# EAGLE board PCB v55 (EAGLE 9.7.0)
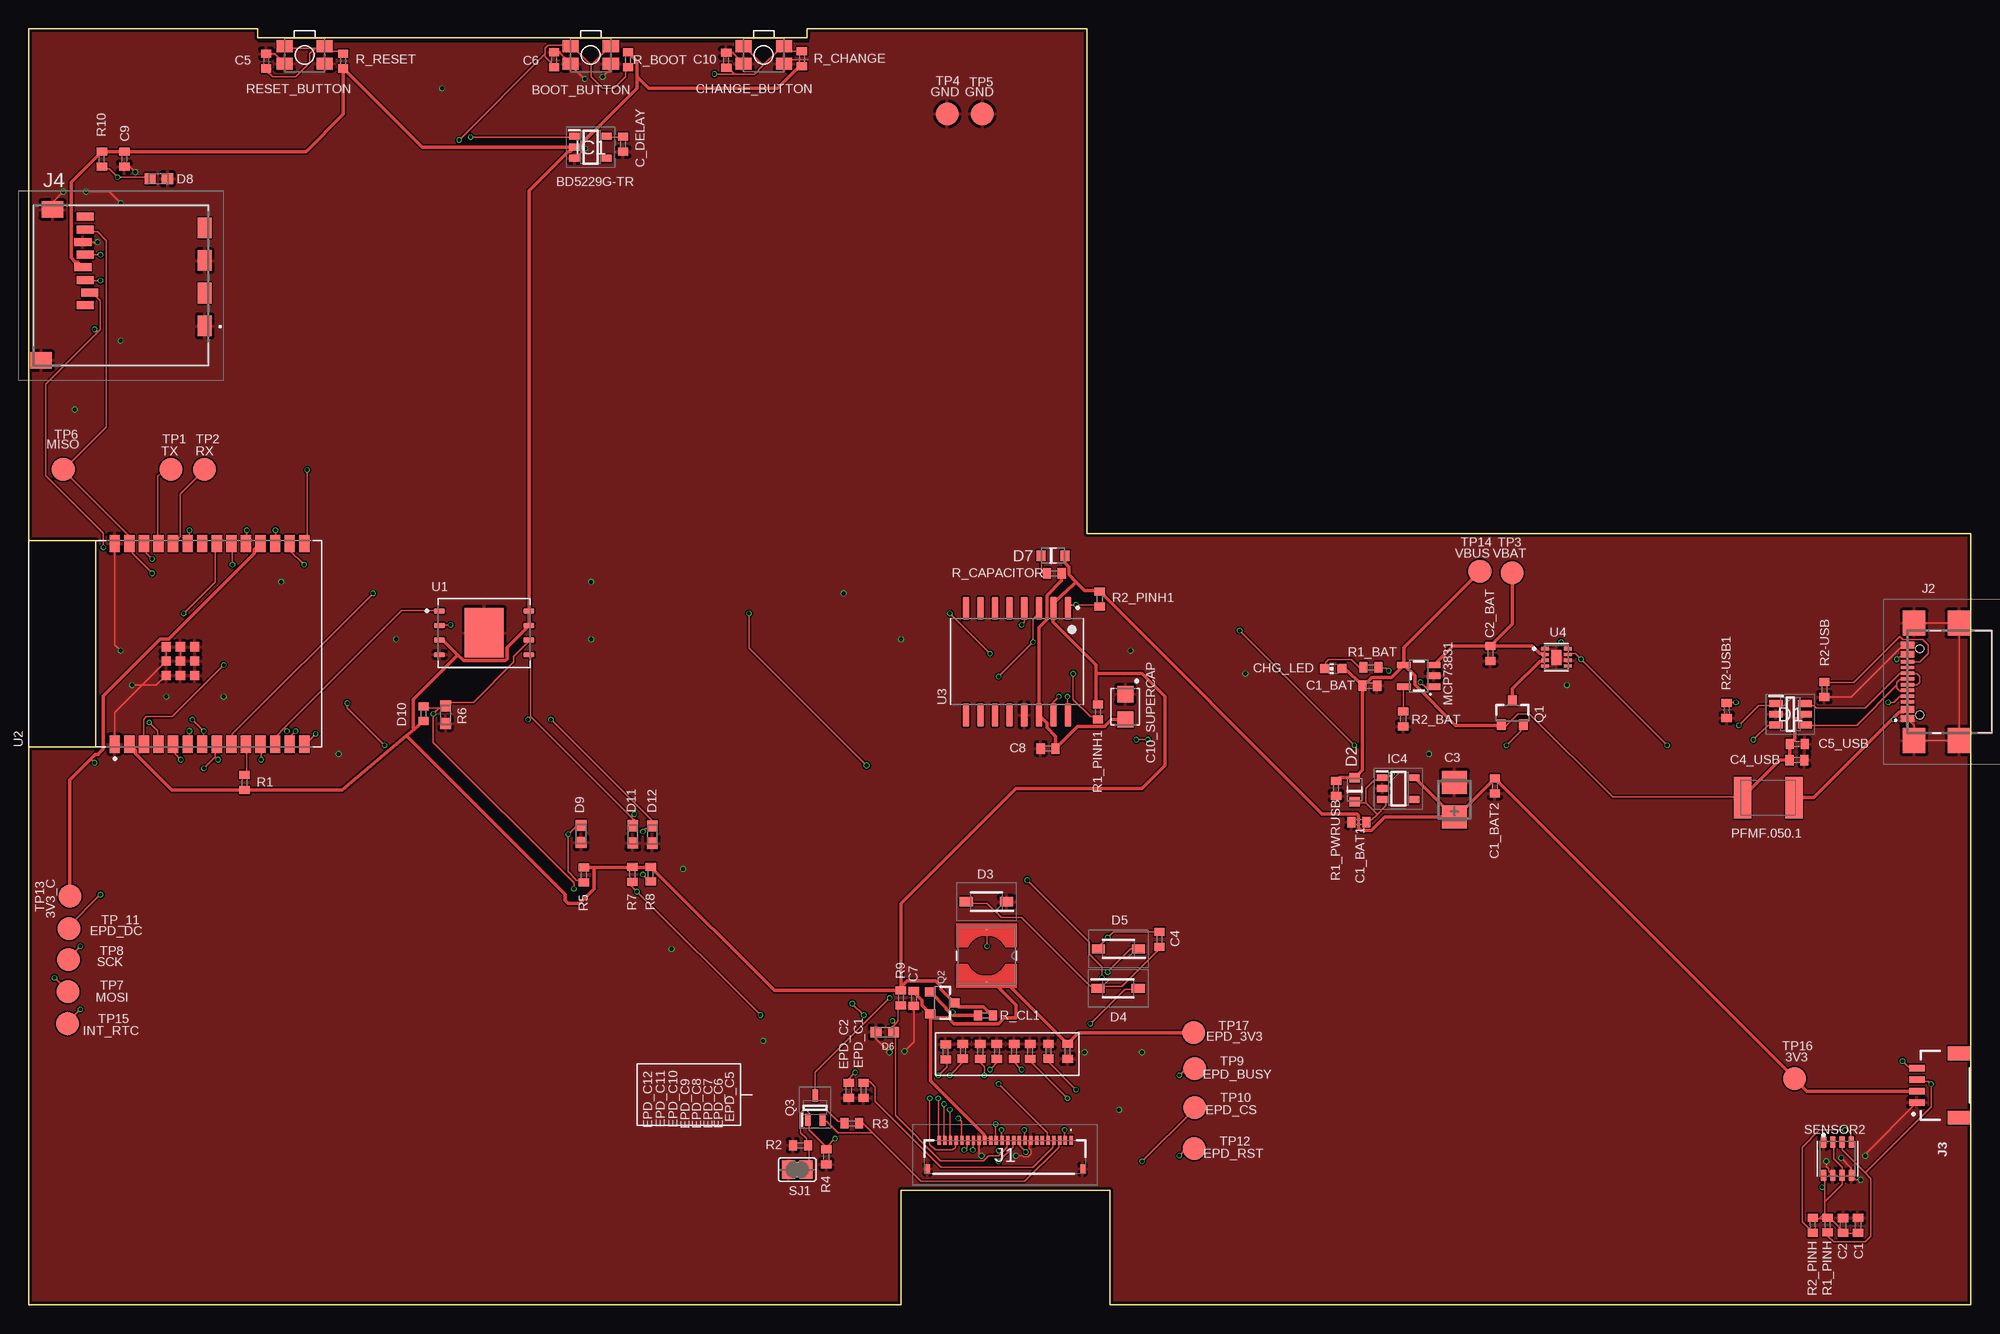
[diagram p0: board, top side]
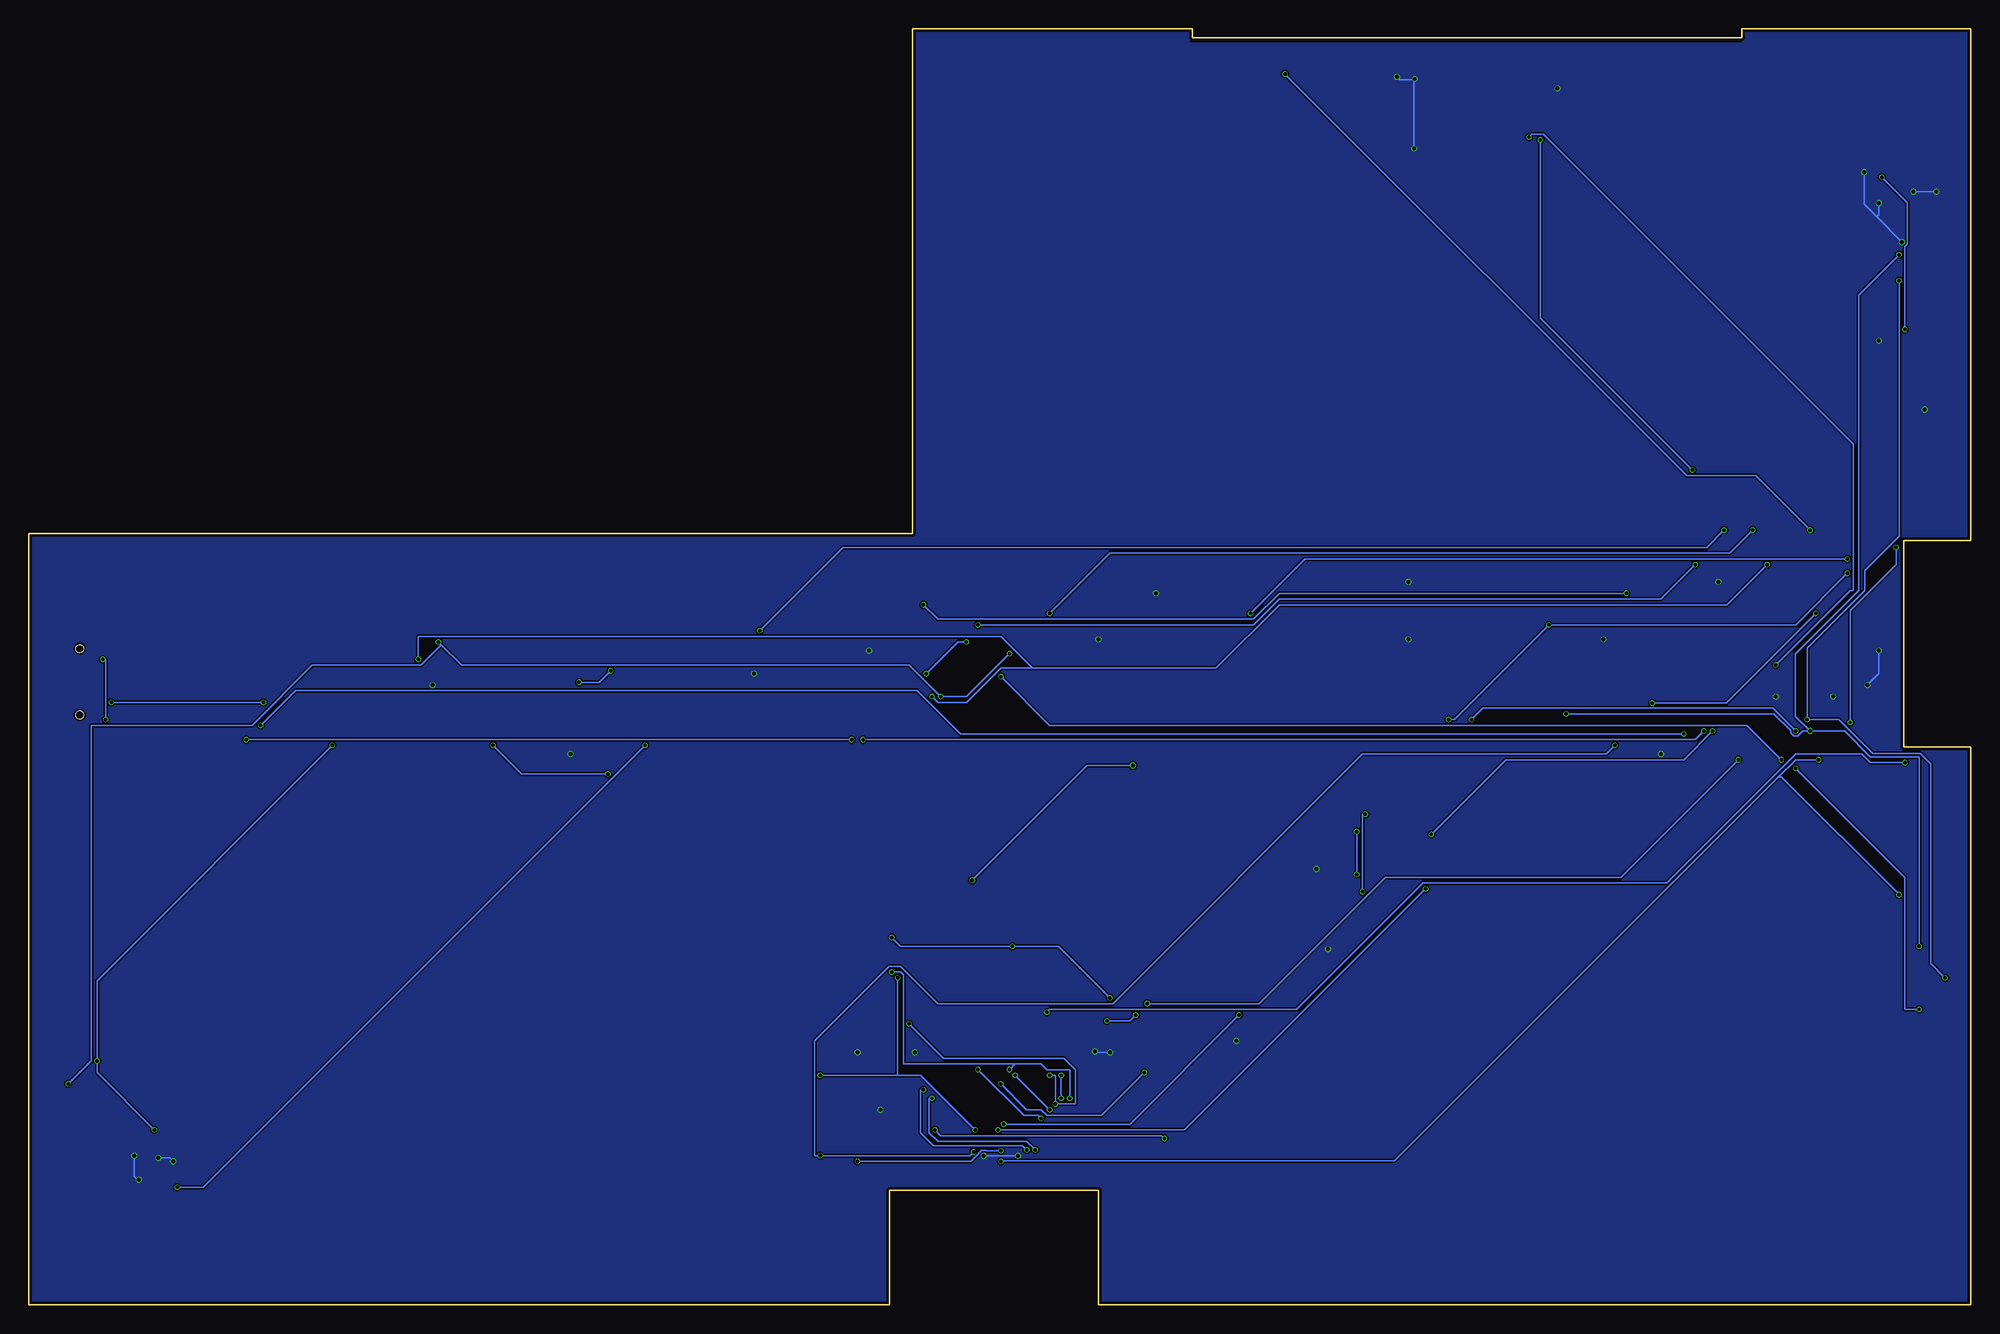
[diagram p1: board, bottom side, seen from below]

Size 169.2 x 111.2 mm. Coordinates in mm from the lower left corner, seen from the top.
Outline: 0,111.2 19.95,111.2 19.95,110.4 67.8,110.4 67.8,110.4 67.8,111.2 92.2,111.2 92.2,67.2 169.2,67.2 169.2,0 94.2,0 94.2,10 76,10 76,0 0,0 0,48.6 5.86,48.6 5.86,66.6 0,66.6 0,111.2
Copper layers (1*16): Top 0.035mm / dielectric 1.6mm / Bottom 0.035mm
Design rules "jlcpcb-2layers.dru *": minimum track width 0.13mm, minimum drill 0.3mm, track to track 5mil, track to pad 5mil, pad to pad 5mil, via to via 5mil, smd to smd 5mil, copper to edge 0.2mm, drill to drill 6mil, minimum pad ring 10mil, minimum via ring 3mil, stop-mask expansion 4mil, vias tented up to drill 0mil, thermal gap 10mil

## Footprints (pad centres in the part's own frame; a part is rotated, then mirrored left to right if it is on the bottom)
MYBUTTON = smd 1.4 x 1.05: 1 1.75,0.75; 2 -1.75,0.75; 3 -1.75,-0.75; 4 1.75,-0.75
EAGLE-LTSPICE_C0402 = smd 0.7 x 0.9: 1 -0.65,0; 2 0.65,0
RCL_CT3528 = smd 2 x 2.2: + -1.5,0; - 1.5,0
CAPCP3225X100N = smd 1.4 x 1.4: 1 -1.1,0; 2 1.1,0
ADAFRUIT_CHIP-LED0603 = smd 0.8 x 0.8: A 0,-0.75; C 0,0.75
SOT95P280X145-6N = smd 1.2 x 0.6: 1 -1.25,0.95; 2 -1.25,0; 3 -1.25,-0.95; 4 1.25,-0.95; 5 1.25,0; 6 1.25,0.95
ESP32_WROVER_AVX---SD0805S020S1R0_AVX_SD0805S020S1R0_0 = smd 0.8 x 0.9: 1 -1.05,0; 2 1.05,0
SOD3716X135N = smd 1.15 x 0.8: 1 -1.75,0; 2 1.75,0
DIOC1608X36N = smd 0.97 x 0.94: 1 -0.75,0; 2 0.75,0
SOT95P280X125-5N = smd 0.9 x 0.6: 1 -1.4,0.95; 2 -1.4,0; 3 -1.4,-0.95; 4 1.4,-0.95; 5 1.4,0.95
SOT95P280X120-5N = smd 0.9 x 0.6: 1 -1.4,0.95; 2 -1.4,0; 3 -1.4,-0.95; 4 1.4,-0.95; 5 1.4,0.95
FH34SRJ24S05SH99 = smd 0.3 x 0.8: 1 5.75,1.45; 2 5.25,1.45; 3 4.75,1.45; 4 4.25,1.45; 5 3.75,1.45; 6 3.25,1.45; 7 2.75,1.45; 8 2.25,1.45; 9 1.75,1.45; 10 1.25,1.45; 11 0.75,1.45; 12 0.25,1.45; 13 -0.25,1.45; 14 -0.75,1.45; 15 -1.25,1.45; 16 -1.75,1.45; 17 -2.25,1.45; 18 -2.75,1.45; 19 -3.25,1.45; 20 -3.75,1.45; 21 -4.25,1.45; 22 -4.75,1.45; 23 -5.25,1.45; 24 -5.75,1.45 | smd 0.4 x 0.8: MP1 6.75,-1.05; MP2 -6.75,-1.05
SAMACSYS_PARTS_USB4110GFA = smd 0.3 x 1.15: A1 -3.35,3.678; A4 -2.55,3.678; A5 -1.25,3.678; A6 -0.25,3.678; A7 0.25,3.678; A8 1.25,3.678; A9 2.55,3.678; A12 3.35,3.678; B1 3.05,3.678; B4 2.25,3.678; B5 1.75,3.678; B6 0.75,3.678; B7 -0.75,3.678; B8 -1.75,3.678; B9 -2.25,3.678; B12 -3.05,3.678 | smd 2.18 x 2: MP1 -5.11,-0.827; MP2 5.11,-0.827; MP3 -5.11,3.103; MP4 5.11,3.103 | hole 0.65: -2.89,2.603; 2.89,2.603
JST04_1MM_RA = smd 0.6 x 1.35: 1 -1.5,0; 2 -0.5,0; 3 0.5,0; 4 1.5,0 | smd 1.2 x 2: NC1 2.8,-3.675; NC2 -2.8,-3.675
112ATAARR03ATTEND = smd 1.8 x 1.2: G1 10.6,10.4; G2 4.9,10.4; S1 7.75,10.4; S2 2.05,10.4 | smd 1.4 x 1.9: G3 13.6,-3.85; G4 0.45,-2.85 | smd 0.7 x 1.5: P1 8.8,0; P2 7.7,0.4; P3 6.6,0; P4 5.5,-0.2; P5 4.4,0; P6 3.3,-0.2; P7 2.2,0; P8 1.1,0
IND_4828-WE-TPC_WRE = smd 0.127 x 0.127: 1 -2.286,0; 2 2.286,0
ESP32_WROVER_SPARKFUN-IC-POWER_SOT23-5 = smd 0.55 x 1.2: 1 -0.95,-1.3; 2 0,-1.3; 3 0.95,-1.3; 4 0.95,1.3; 5 -0.95,1.3
ESP32C6_VARISTOR_CT/CN1812 = smd 1.5 x 3.6: 1 -2.25,0; 2 2.25,0
ESP32_WROVER_SPARKFUN-DISCRETESEMI_SOT23-3 = smd 0.8 x 0.9: 1 -0.95,-1; 2 0.95,-1; 3 0,1.1
SOT65P210X110-3N = smd 1.05 x 0.5: 1 -1.05,0.65; 2 -1.05,-0.65; 3 1.05,0
ESP32_WROVER_EAGLE-LTSPICE_R0402 = smd 0.7 x 0.9: 1 -0.65,0; 2 0.65,0
ESP32_WROVER_BME680_PSON80P300X300X100-8N = smd 1.016 x 0.5: 1 1.458,1.2; 2 1.458,0.4; 3 1.458,-0.4; 4 1.458,-1.2; 5 -1.458,-1.22; 6 -1.458,-0.4; 7 -1.458,0.4; 8 -1.458,1.2
SJ = smd 1.168 x 1.6: 1 -0.762,0; 2 0.762,0
TP20R = smd 2 x 2: TP 0,0
SON127P600X800X80-9N = smd 0.94 x 0.44: 1 -3.895,1.905; 2 -3.895,0.635; 3 -3.895,-0.635; 4 -3.895,-1.905; 5 3.895,-1.905; 6 3.895,-0.635; 7 3.895,0.635; 8 3.895,1.905 | smd 3.4 x 4.3: 9 0,0
XCVR_ESP32-C6-WROOM-1-N8 = smd 1.5 x 0.9: 1 -8.75,5.26; 2 -8.75,3.99; 3 -8.75,2.72; 4 -8.75,1.45; 5 -8.75,0.18; 6 -8.75,-1.09; 7 -8.75,-2.36; 8 -8.75,-3.63; 9 -8.75,-4.9; 10 -8.75,-6.17; 11 -8.75,-7.44; 12 -8.75,-8.71; 13 -8.75,-9.98; 14 -8.75,-11.25; 15 8.75,-11.25; 16 8.75,-9.98; 17 8.75,-8.71; 18 8.75,-7.44; 19 8.75,-6.17; 20 8.75,-4.9; 21 8.75,-3.63; 22 8.75,-2.36; 23 8.75,-1.09; 24 8.75,0.18; 25 8.75,1.45; 26 8.75,2.72; 27 8.75,3.99; 28 8.75,5.26 | smd 0.8 x 0.8: 29_1 -2.755,0.79; 29_2 -1.505,0.79; 29_3 -0.255,0.79; 29_4 -2.755,-0.46; 29_5 -1.505,-0.46; 29_6 -0.255,-0.46; 29_7 -2.755,-1.71; 29_8 -1.505,-1.71; 29_9 -0.255,-1.71
SOIC127P1032X265-16N = smd 2.05 x 0.59: 1 -4.655,4.445; 2 -4.655,3.175; 3 -4.655,1.905; 4 -4.655,0.635; 5 -4.655,-0.635; 6 -4.655,-1.905; 7 -4.655,-3.175; 8 -4.655,-4.445; 9 4.655,-4.445; 10 4.655,-3.175; 11 4.655,-1.905; 12 4.655,-0.635; 13 4.655,0.635; 14 4.655,1.905; 15 4.655,3.175; 16 4.655,4.445
SON50P200X200X80-9N = smd 0.76 x 0.27: 1 -0.985,0.75; 2 -0.985,0.25; 3 -0.985,-0.25; 4 -0.985,-0.75; 5 0.985,-0.75; 6 0.985,-0.25; 7 0.985,0.25; 8 0.985,0.75 | smd 0.9 x 1.3: 9 0,0

## Placement (x,y rotation side)
BOOT_BUTTON  BUTTON_CUSYOMV1  [MYBUTTON]  48.97,108.91 180 top
C1  100nF  [EAGLE-LTSPICE_C0402]  159.37,6.94 90 top
C1_BAT  4.7uF  [EAGLE-LTSPICE_C0402]  116.83,53.95 0 top
C1_BAT1  4.7uF  [EAGLE-LTSPICE_C0402]  115.88,42.07 0 top
C1_BAT2  4.7uF  [EAGLE-LTSPICE_C0402]  127.73,45.22 90 top
C2  100nF  [EAGLE-LTSPICE_C0402]  158.07,6.92 90 top
C2_BAT  4.7uF  [EAGLE-LTSPICE_C0402]  127.35,56.76 270 top
C3  100uF TANT  [RCL_CT3528]  124.2,44.01 90 top
C4  4.7uF/25V  [EAGLE-LTSPICE_C0402]  98.51,31.85 90 top
C4_USB  100nF  [EAGLE-LTSPICE_C0402]  154.06,47.47 0 top
C5  1uF  [EAGLE-LTSPICE_C0402]  20.69,108.38 90 top
C5_USB  4.7uF  [EAGLE-LTSPICE_C0402]  154.07,48.87 0 top
C6  100nF  [EAGLE-LTSPICE_C0402]  45.77,108.48 90 top
C7  10uF  [EAGLE-LTSPICE_C0402]  77.12,26.71 270 top
C8  100nF  [EAGLE-LTSPICE_C0402]  88.82,48.47 180 top
C9  100nF  [EAGLE-LTSPICE_C0402]  8.33,99.84 270 top
C10  100nF  [EAGLE-LTSPICE_C0402]  60.77,108.44 90 top
C10_SUPERCAP  CPH3225A  [CAPCP3225X100N]  95.54,52.11 270 top
C_DELAY  100nF  [EAGLE-LTSPICE_C0402]  51.79,101.13 270 top
CHANGE_BUTTON  BUTTON_CUSYOMV1  [MYBUTTON]  64.04,108.91 180 top
CHG_LED  [ADAFRUIT_CHIP-LED0603]  113.65,55.44 90 top
D1  USBLC6-2SC6Y  [SOT95P280X145-6N]  153.48,51.47 0 top
D2  ESP32_WROVER_AVX---SD0805S020S1R0_AVX_SD0805S020S1R0_0_0AVX_SD0805S020S1R0_0_0  [ESP32_WROVER_AVX---SD0805S020S1R0_AVX_SD0805S020S1R0_0]  115.52,44.89 90 top
D3  MBR0530  [SOD3716X135N]  83.44,35.13 180 top
D4  MBR0530  [SOD3716X135N]  94.92,27.58 0 top
D5  MBR0530  [SOD3716X135N]  94.94,31.02 180 top
D6  PGB1010603MR  [DIOC1608X36N]  74.58,23.77 0 top
D7  ESP32_WROVER_AVX---SD0805S020S1R0_AVX_SD0805S020S1R0_0_0AVX_SD0805S020S1R0_0_0  [ESP32_WROVER_AVX---SD0805S020S1R0_AVX_SD0805S020S1R0_0]  89.24,65.28 0 top
D8  PGB1010603MR  [DIOC1608X36N]  11.34,98.13 180 top
D9  PGB1010603MR  [DIOC1608X36N]  48.13,41.04 90 top
D10  PGB1010603MR  [DIOC1608X36N]  36.33,51.42 90 top
D11  PGB1010603MR  [DIOC1608X36N]  52.63,41 90 top
D12  PGB1010603MR  [DIOC1608X36N]  54.33,40.98 90 top
EPD_C1  1uF/50V  [EAGLE-LTSPICE_C0402]  72.73,18.68 90 top
EPD_C2  1uF/50V  [EAGLE-LTSPICE_C0402]  71.45,18.68 90 top
EPD_C5  01.uF/50V  [EAGLE-LTSPICE_C0402]  90.51,22.09 90 top
EPD_C6  1uF/50V  [EAGLE-LTSPICE_C0402]  88.85,22.11 270 top
EPD_C7  1uF/50V  [EAGLE-LTSPICE_C0402]  87.25,22.1 270 top
EPD_C8  1uF/50V  [EAGLE-LTSPICE_C0402]  85.85,22.09 270 top
EPD_C9  1uF/50V  [EAGLE-LTSPICE_C0402]  84.35,22.08 270 top
EPD_C10  1uF/50V  [EAGLE-LTSPICE_C0402]  82.9,22.09 270 top
EPD_C11  1uF/50V  [EAGLE-LTSPICE_C0402]  81.39,22.11 270 top
EPD_C12  1uF/50V  [EAGLE-LTSPICE_C0402]  79.89,22.05 270 top
IC1  BD5229G-TR  [SOT95P280X125-5N]  48.95,100.87 0 top
IC4  XC6220A331MR-G  [SOT95P280X120-5N]  119.33,44.99 0 top
J1  FH34SRJ-24S-0.5SH_99_  [FH34SRJ24S05SH99]  85.06,12.89 0 top
J2  SAMACSYS_PARTS_USB4110-GF-A  [SAMACSYS_PARTS_USB4110GFA]  167.36,54.29 90 top
J3  QWIIC_RIGHT_ANGLE  [JST04_1MM_RA]  164.51,19.13 90 top
J4  112A-TAAR-R03_ATTEND  [112ATAARR03ATTEND]  4.93,95.9 270 top
L1  68uH  [IND_4828-WE-TPC_WRE]  83.45,30.43 270 top
MCP73831  ESP32_WROVER_SPARKFUN-IC-POWER_MCP73831  [ESP32_WROVER_SPARKFUN-IC-POWER_SOT23-5]  121.11,54.81 90 top
PFMF.050.1  ESP32C6_VARISTORCN1812  [ESP32C6_VARISTOR_CT/CN1812]  151.56,44.2 180 top
Q1  20V/4.2A/52mΩ/1.4W  [ESP32_WROVER_SPARKFUN-DISCRETESEMI_SOT23-3]  129.26,51.56 0 top
Q2  20V/4.2A/52mΩ/1.4W  [ESP32_WROVER_SPARKFUN-DISCRETESEMI_SOT23-3]  79.56,26.32 270 top
Q3  SI1308EDL-T1-GE3  [SOT65P210X110-3N]  68.52,17.19 90 top
R1  10k  [ESP32_WROVER_EAGLE-LTSPICE_R0402]  18.81,45.51 270 top
R1_BAT  200  [ESP32_WROVER_EAGLE-LTSPICE_R0402]  116.95,55.55 0 top
R1_PINH  10k  [ESP32_WROVER_EAGLE-LTSPICE_R0402]  156.73,6.96 90 top
R1_PINH1  10K  [ESP32_WROVER_EAGLE-LTSPICE_R0402]  93.16,51.66 90 top
R1_PWRUSB  100K  [ESP32_WROVER_EAGLE-LTSPICE_R0402]  113.9,45 90 top
R2  2.2  [ESP32_WROVER_EAGLE-LTSPICE_R0402]  67.23,13.91 0 top
R2-USB  5k1  [ESP32_WROVER_EAGLE-LTSPICE_R0402]  156.43,53.62 270 top
R2-USB1  5k1  [ESP32_WROVER_EAGLE-LTSPICE_R0402]  147.93,51.8 90 top
R2_BAT  2K  [ESP32_WROVER_EAGLE-LTSPICE_R0402]  119.75,51.06 90 top
R2_PINH  10k  [ESP32_WROVER_EAGLE-LTSPICE_R0402]  155.43,6.94 90 top
R2_PINH1  10K  [ESP32_WROVER_EAGLE-LTSPICE_R0402]  93.31,61.51 90 top
R3  0.47  [ESP32_WROVER_EAGLE-LTSPICE_R0402]  71.71,15.83 0 top
R4  10k  [ESP32_WROVER_EAGLE-LTSPICE_R0402]  69.49,12.91 90 top
R5  10K  [ESP32_WROVER_EAGLE-LTSPICE_R0402]  48.37,37.45 90 top
R6  10K  [ESP32_WROVER_EAGLE-LTSPICE_R0402]  34.41,51.51 270 top
R7  10K  [ESP32_WROVER_EAGLE-LTSPICE_R0402]  52.59,37.51 90 top
R8  10K  [ESP32_WROVER_EAGLE-LTSPICE_R0402]  54.19,37.53 90 top
R9  10K  [ESP32_WROVER_EAGLE-LTSPICE_R0402]  75.99,26.75 90 top
R10  10K  [ESP32_WROVER_EAGLE-LTSPICE_R0402]  6.37,99.83 90 top
R_BOOT  10K  [ESP32_WROVER_EAGLE-LTSPICE_R0402]  52.22,108.48 90 top
R_CAPACITOR  15  [ESP32_WROVER_EAGLE-LTSPICE_R0402]  89.35,63.74 0 top
R_CHANGE  10K  [ESP32_WROVER_EAGLE-LTSPICE_R0402]  67.37,108.58 270 top
R_CL1  10k  [ESP32_WROVER_EAGLE-LTSPICE_R0402]  83.36,25.23 0 top
R_RESET  10K  [ESP32_WROVER_EAGLE-LTSPICE_R0402]  27.4,108.38 270 top
RESET_BUTTON  BUTTON_CUSYOMV1  [MYBUTTON]  24.05,108.91 180 top
SENSOR2  ESP32_WROVER_BME680_BME680  [ESP32_WROVER_BME680_PSON80P300X300X100-8N]  157.58,12.74 90 top
SJ1  [SJ]  66.96,11.79 0 top
TP1  TPTP20R  [TP20R]  12.41,72.79 0 top
TP2  TPTP20R  [TP20R]  15.33,72.79 0 top
TP3  TPTP20R  [TP20R]  129.25,63.79 0 top
TP4  TPTP20R  [TP20R]  80.02,103.79 0 top
TP5  TPTP20R  [TP20R]  83.09,103.79 0 top
TP6  TPTP20R  [TP20R]  3.01,72.79 0 top
TP7  TPTP20R  [TP20R]  3.43,27.29 0 top
TP8  TPTP20R  [TP20R]  3.45,30.09 0 top
TP9  TPTP20R  [TP20R]  101.57,20.59 0 top
TP10  TPTP20R  [TP20R]  101.58,17.21 0 top
TP12  TPTP20R  [TP20R]  101.53,13.61 0 top
TP13  TPTP20R  [TP20R]  3.58,35.61 0 top
TP14  TPTP20R  [TP20R]  126.43,63.91 0 top
TP15  TPTP20R  [TP20R]  3.38,24.51 0 top
TP16  TPTP20R  [TP20R]  153.83,19.71 0 top
TP17  TPTP20R  [TP20R]  101.48,23.71 0 top
TP_11  TPTP20R  [TP20R]  3.49,32.79 0 top
U1  W25Q512JVEIQ  [SON127P600X800X80-9N]  39.69,58.56 0 top
U2  ESP32-C6-WROOM-1-N8  [XCVR_ESP32-C6-WROOM-1-N8]  12.76,57.6 90 top
U3  DS3231SN#  [SOIC127P1032X265-16N]  86.1,56.05 270 top
U4  MAX17048G+T10  [SON50P200X200X80-9N]  133.1,56.42 0 top

## Library data of the parts
BOOT_BUTTON CHANGE_BUTTON CHG_LED PFMF.050.1 RESET_BUTTON SJ1 TP1-TP10 TP12-TP17 TP_11 = DeskAssistant v19 v1
C1 C1_BAT C1_BAT1 C1_BAT2 C2 C2_BAT C4 C4_USB C5 C5_USB C6-C10 C_DELAY EPD_C1 EPD_C2 EPD_C5-EPD_C12 = DeskAssistant v19 v1; SPICEMODEL: NONE; SPICEPREFIX: C
C3 = DeskAssistant v19 v1; SPICEPREFIX: C
C10_SUPERCAP = DeskAssistant v19 v1; AVAILABILITY: Not in stock; CHECK_PRICES: https://www.snapeda.com/parts/CPH3225A/Seiko+Instruments/view-part/?ref=eda; DESCRIPTION: 11 mF (EDLC) Supercapacitor 3.3 V 1210 (3225 Metric) - -; MF: Seiko Instruments; MP: CPH3225A; PACKAGE: 1210 Seiko; PRICE: None; PURCHASE-URL: https://www.snapeda.com/api/url_track_click_mouser/?unipart_id=562593&manufacturer=Seiko Instruments&part_name=CPH3225A&search_term=None; SNAPEDA_LINK: https://www.snapeda.com/parts/CPH3225A/Seiko+Instruments/view-part/?ref=snap
D1 = DeskAssistant v19 v1; AVAILABILITY: In Stock; CHECK_PRICES: https://www.snapeda.com/parts/USBLC6-2SC6Y/STMicroelectronics/view-part/?ref=eda; DESCRIPTION: 17V Clamp 5A (8/20µs) Ipp Tvs Diode Surface Mount SOT-23-6; MF: STMicroelectronics; MP: USBLC6-2SC6Y; PACKAGE: SOT-23-6 STMicroelectronics; PRICE: None; SNAPEDA_LINK: https://www.snapeda.com/parts/USBLC6-2SC6Y/STMicroelectronics/view-part/?ref=snap
D2 D7 = DeskAssistant v19 v1; CENTROID_NOT_SPECIFIED: No; DATASHEET: http://datasheets.avx.com/schottky.pdf; DIGIKEY_DESCRIPTION: DIODE SCHOTTKY 20V 1A 0805; DIGIKEY_PART_NUMBER: 478-7800-1-ND; LEAD_FREE: yes; MF: AVX; MOUSER_PART_NUMBER: 581-SD0805S020S1R0; PACKAGE: 0805 (2012 metric); PREFIX: D; ROHS: yes; TEMPERATURE_RANGE_HIGH: +125°C; TEMPERATURE_RANGE_LOW: -55°C
D3-D5 = DeskAssistant v19 v1; AVAILABILITY: In Stock; CHECK_PRICES: https://www.snapeda.com/parts/MBR0530/Onsemi/view-part/?ref=eda; DESCRIPTION: Diode Schottky 30 V 500mA Surface Mount SOD-123; MF: ON Semiconductor; MP: MBR0530; PACKAGE: SOD-123-2 ON Semiconductor; PRICE: None; PURCHASE-URL: https://www.snapeda.com/api/url_track_click_mouser/?unipart_id=179458&manufacturer=ON Semiconductor&part_name=MBR0530&search_term=None; SNAPEDA_LINK: https://www.snapeda.com/parts/MBR0530/Onsemi/view-part/?ref=snap
D6 D8-D12 = DeskAssistant v19 v1; AVAILABILITY: In Stock; CHECK_PRICES: https://www.snapeda.com/parts/PGB1010603MR/Littelfuse/view-part/?ref=eda; DESCRIPTION: 150V (Typ) Clamp - Ipp Tvs Diode Surface Mount 0603 (1608 Metric); MF: Littelfuse Inc.; MP: PGB1010603MR; PACKAGE: 0603 Littelfuse Inc.; PRICE: None; PURCHASE-URL: https://www.snapeda.com/api/url_track_click_mouser/?unipart_id=5659453&manufacturer=Littelfuse Inc.&part_name=PGB1010603MR&search_term=None; SNAPEDA_LINK: https://www.snapeda.com/parts/PGB1010603MR/Littelfuse/view-part/?ref=snap
IC1 = DeskAssistant v19 v1; DESCRIPTION: Voltage Detector with Adjustable Delay Time: CMOS processes are utilized to develop high precision, low current consumption CMOS reset ICs that allow arbitrary setting of the delay time. The extensive lineup includes both Nch Open Drain and CMOS output types in a wide range of detection voltages (from 2.3V to 6.0V, in 0.1V steps), enabling selection of the ideal solution based on customer requirements. In addition, the entire series is of course both lead-free and RoHS-compliant.; HEIGHT: 1.25mm; MANUFACTURER_NAME: ROHM Semiconductor; MANUFACTURER_PART_NUMBER: BD5229G-TR; MOUSER_PART_NUMBER: 755-BD5229G-TR; MOUSER_PRICE-STOCK: https://www.mouser.co.uk/ProductDetail/ROHM-Semiconductor/BD5229G-TR?qs=4kLU8WoGk0vvnhrrYwdszw%3D%3D
IC4 = DeskAssistant v19 v1; DESCRIPTION: LDO Voltage Regulators; HEIGHT: 1.2mm; MANUFACTURER_NAME: Torex; MANUFACTURER_PART_NUMBER: XC6220A331MR-G; MOUSER_PART_NUMBER: 865-XC6220A331MR-G; MOUSER_PRICE-STOCK: https://www.mouser.co.uk/ProductDetail/Torex-Semiconductor/XC6220A331MR-G?qs=AsjdqWjXhJ8ZSWznL1J0gg%3D%3D
J1 = DeskAssistant v19 v1; DESCRIPTION: 24 Position FFC, FPC Connector Contacts, Top and Bottom 0.020" (0.50mm) Surface Mount, Right Angle; HEIGHT: 1.1mm; MANUFACTURER_NAME: Hirose; MANUFACTURER_PART_NUMBER: FH34SRJ-24S-0.5SH(99); MOUSER_PART_NUMBER: 798-FH34SRJ24S05SH99; MOUSER_PRICE-STOCK: https://www.mouser.co.uk/ProductDetail/Hirose-Connector/FH34SRJ-24S-0.5SH99?qs=vcbW%252B4%252BSTIpKBl5ap9J8Fw%3D%3D
J2 = DeskAssistant v19 v1; DESCRIPTION: CONN USB 2.0 TYPE-C R/A SMT; HEIGHT: 3.26mm; MANUFACTURER_NAME: GCT (GLOBAL CONNECTOR TECHNOLOGY); MANUFACTURER_PART_NUMBER: USB4110-GF-A; MOUSER_PART_NUMBER: 640-USB4110-GF-A; MOUSER_PRICE-STOCK: https://www.mouser.co.uk/ProductDetail/GCT/USB4110-GF-A?qs=KUoIvG%2F9IlYiZvIXQjyJeA%3D%3D
J3 = DeskAssistant v19 v1; PROD_ID: CONN-13694
J4 = DeskAssistant v19 v1; DESCRIPTION: Micro SD Card Socket, Push-Push Type, Top Mount, SMT, H=1.83mm, 10u; HEIGHT: 1.9mm; MANUFACTURER_NAME: ATTEND; MANUFACTURER_PART_NUMBER: 112A-TAAR-R03 ATTEND
L1 = DeskAssistant v19 v1; COPYRIGHT: Copyright (C) 2024 Ultra Librarian. All rights reserved.; MANUFACTURER_PART_NUMBER: 744043680; MFR_NAME: Wurth Electronics
MCP73831 = DeskAssistant v19 v1; PROD_ID: IC-09995
Q1 Q2 = DeskAssistant v19 v1; PROD_ID: TRAN-14388
Q3 = DeskAssistant v19 v1; AVAILABILITY: In Stock; CHECK_PRICES: https://www.snapeda.com/parts/SI1308EDL-T1-GE3/Vishay+Siliconix/view-part/?ref=eda; DESCRIPTION: Si1308EDL-T1-GE3 N-channel MOSFET Transistor, 1.5 A, 30 V, 3-Pin SC-70 | Siliconix / Vishay SI1308EDL-T1-GE3; MF: Vishay Siliconix; MP: SI1308EDL-T1-GE3; PACKAGE: SOT-323 Vishay Semiconductor; PRICE: None; PURCHASE-URL: https://www.snapeda.com/api/url_track_click_mouser/?unipart_id=274603&manufacturer=Vishay Siliconix&part_name=SI1308EDL-T1-GE3&search_term=None; SNAPEDA_LINK: https://www.snapeda.com/parts/SI1308EDL-T1-GE3/Vishay+Siliconix/view-part/?ref=snap
R1 R1_BAT R1_PINH R1_PINH1 R1_PWRUSB R2 R2-USB R2-USB1 R2_BAT R2_PINH R2_PINH1 R3-R10 R_BOOT R_CAPACITOR R_CHANGE R_CL1 R_RESET = DeskAssistant v19 v1; SPICEMODEL: NONE; SPICEPREFIX: R
SENSOR2 = DeskAssistant v19 v1; AVAILABILITY: Unavailable; DESCRIPTION: Integrated Environmental Unit; MF: Bosch Sensortec; MP: BME680; PACKAGE: LGA-8 Bosch Tools; PRICE: None
U1 = DeskAssistant v19 v1; AVAILABILITY: In Stock; CHECK_PRICES: https://www.snapeda.com/parts/W25Q512JVEIQ/Winbond+Electronics/view-part/?ref=eda; DESCRIPTION: FLASH - NOR Memory IC 512Mb (64M x 8) SPI - Quad I/O 133 MHz 8-WSON (8x6); MF: Winbond Electronics; MP: W25Q512JVEIQ; PACKAGE: Package; PRICE: None; SNAPEDA_LINK: https://www.snapeda.com/parts/W25Q512JVEIQ/Winbond+Electronics/view-part/?ref=snap
U2 = DeskAssistant v19 v1; AVAILABILITY: In Stock; CHECK_PRICES: https://www.snapeda.com/parts/ESP32-C6-WROOM-1-N8/Espressif+Systems/view-part/?ref=eda; DESCRIPTION: Multiprotocol Modules ESP32-C6 module, Wi-Fi 6 in 2.4 GHz band, Bluetooth 5, Zigbee 3.0 and Thread. ESP34-WROOM Compatible - ENGINEERING SAMPLE; MF: Espressif Systems; MP: ESP32-C6-WROOM-1-N8; PACKAGE: None; PRICE: None; SNAPEDA_LINK: https://www.snapeda.com/parts/ESP32-C6-WROOM-1-N8/Espressif+Systems/view-part/?ref=snap
U3 = DeskAssistant v19 v1; AVAILABILITY: In Stock; CHECK_PRICES: https://www.snapeda.com/parts/DS3231SN%23/Analog+Devices/view-part/?ref=eda; DESCRIPTION: Extremely Accurate I²C-Integrated RTC/TCXO/Crystal; MF: Analog Devices; MP: DS3231SN#; PACKAGE: SOIC-16 Maxim; PRICE: None; PURCHASE-URL: https://www.snapeda.com/api/url_track_click_mouser/?unipart_id=99048&manufacturer=Analog Devices&part_name=DS3231SN#&search_term=None; SNAPEDA_LINK: https://www.snapeda.com/parts/DS3231SN%23/Analog+Devices/view-part/?ref=snap
U4 = DeskAssistant v19 v1; AVAILABILITY: In Stock; CHECK_PRICES: https://www.snapeda.com/parts/MAX17048G+T10/Analog+Devices/view-part/?ref=eda; DESCRIPTION: 3µA 1-Cell/2-Cell Fuel Gauge with ModelGauge; MF: Analog Devices; MP: MAX17048G+T10; PACKAGE: TDFN-8 Maxim; PRICE: None; PURCHASE-URL: https://www.snapeda.com/api/url_track_click_mouser/?unipart_id=329239&manufacturer=Analog Devices&part_name=MAX17048G+T10&search_term=None; SNAPEDA_LINK: https://www.snapeda.com/parts/MAX17048G+T10/Analog+Devices/view-part/?ref=snap

## Nets
3V3: C1_BAT2.2 C3.+ C9.1 D7.2 IC1.2 IC4.5 J3.2 J4.P4 Q2.3 R1.2 R1_PINH1.2 R2_PINH1.2 R5.2 R6.2 R7.2 R8.2 R9.2 R10.2 R_BOOT.2 R_CHANGE.2 R_CL1.2 R_RESET.2 TP16.TP U1.3 U1.7 U1.8 U2.2 U3.2
32KHZ: R2_PINH1.1 U2.9 U3.1
DN: D1.4 J2.A7 J2.B7
DP: D1.6 J2.A6 J2.B6
EPD_3V3: C7.1 EPD_C5.2 J1.15 J1.16 L1.2 Q2.2 TP17.TP
EPD_3V3_C: Q2.1 R_CL1.1 TP13.TP U2.18
EPD_BUSY: J1.9 TP9.TP U2.26
EPD_CS: D6.2 J1.12 R9.1 TP10.TP U2.11
EPD_DC: J1.11 TP_11.TP U2.5
EPD_RST: J1.10 TP12.TP U2.21
FLASH_CS: D9.2 R5.1 U1.1 U2.12
GDR: J1.2 Q3.1 R4.2
GND: BOOT_BUTTON.1 BOOT_BUTTON.2 C1.2 C1_BAT1.1 C1_BAT2.1 C1_BAT.2 C2.2 C2_BAT.2 C3.- C4_USB.2 C5.2 C5_USB.2 C6.2 C7.2 C8.2 C9.2 C10.2 C10_SUPERCAP.1 C_DELAY.2 CHANGE_BUTTON.1 CHANGE_BUTTON.2 D1.2 D3.1 D6.1 D8.1 D9.1 D10.1 D11.1 D12.1 EPD_C1.1 EPD_C2.1 EPD_C5.1 EPD_C6.1 EPD_C7.1 EPD_C8.1 EPD_C9.1 EPD_C10.1 EPD_C11.1 EPD_C12.1 IC1.3 IC4.2 J1.8 J1.17 J1.MP1 J1.MP2 J2.A1 J2.A12 J2.B1 J2.B12 J2.MP1 J2.MP2 J2.MP3 J2.MP4 J3.1 J4.G1 J4.G2 J4.G3 J4.G4 J4.P6 MCP73831.2 R1_PWRUSB.1 R2-USB1.1 R2-USB.2 R2.1 R2_BAT.1 R4.1 RESET_BUTTON.1 RESET_BUTTON.2 SENSOR2.1 SENSOR2.5 SENSOR2.7 SJ1.1 TP4.TP TP5.TP U1.4 U1.9 U2.1 U2.28 U2.29_1 U2.29_2 U2.29_3 U2.29_4 U2.29_5 U2.29_6 U2.29_7 U2.29_8 U2.29_9 U3.13 U4.1 U4.4 U4.6 U4.9
GPIO8: R1.1 U2.10
I2C_PW: C1.1 C2.1 R1_PINH.2 R2_PINH.2 SENSOR2.2 SENSOR2.6 SENSOR2.8 U2.17
INT_RTC: R1_PINH1.1 TP15.TP U2.8 U3.3
IO/BOOT: BOOT_BUTTON.3 BOOT_BUTTON.4 C6.1 R_BOOT.1 U2.15
IO/CHANGE: C10.1 CHANGE_BUTTON.3 CHANGE_BUTTON.4 R_CHANGE.1 U2.23
MISO: D12.2 J4.P7 R8.1 TP6.TP U1.2 U2.27
MOSI: D11.2 J1.14 J4.P3 R7.1 TP7.TP U1.5 U2.7
N$1: J2.A5 R2-USB1.2
N$2: J2.B5 R2-USB.1
N$3: C1_BAT1.2 D2.1 IC4.1 IC4.3 Q1.2
N$4: CHG_LED.C R1_BAT.1
N$5: MCP73831.1 R1_BAT.2
N$8: C4.1 D3.2 D4.1
N$9: MCP73831.5 R2_BAT.2
N$10: EPD_C12.2 J1.24
N$11: C_DELAY.1 IC1.5
N$12: EPD_C10.2 J1.22
N$13: C5.1 R_RESET.1 RESET_BUTTON.3 RESET_BUTTON.4
N$14: EPD_C8.2 J1.20
N$15: EPD_C7.2 J1.19
N$16: EPD_C6.2 J1.18
N$18: D7.1 R_CAPACITOR.1
N$24: EPD_C2.2 J1.5
N$25: EPD_C1.2 J1.4
PREVGH: D5.1 EPD_C9.2 J1.21
PREVGL: D4.2 EPD_C11.2 J1.23
RESE: J1.3 Q3.2 R3.2
RESE': R2.2 R3.1 SJ1.2
RESET: IC1.1 U2.3
RTC_RST: U2.16 U3.4
RX: TP2.TP U2.24
SCK: D10.2 J1.13 J4.P5 R6.1 TP8.TP U1.6 U2.6
SCL: J3.4 R2_PINH.1 SENSOR2.4 U2.20 U3.16 U4.7
SDA: J3.3 R1_PINH.1 SENSOR2.3 U2.19 U3.15 U4.8
SRC: C4.2 D5.2 L1.1 Q3.3
SS_SD: D8.2 J4.P2 R10.1 U2.4
TX: TP1.TP U2.25
USB_D+: D1.1 U2.14
USB_D-: D1.3 U2.13
VBAT: C2_BAT.1 MCP73831.3 Q1.3 TP3.TP U4.2 U4.3
VBUS: C1_BAT.1 C4_USB.1 C5_USB.1 CHG_LED.A D1.5 D2.2 MCP73831.4 PFMF.050.1.2 Q1.1 R1_PWRUSB.2 TP14.TP
VRTC: C8.1 C10_SUPERCAP.2 R_CAPACITOR.2 U3.14
VUSB: J2.A4 J2.A9 J2.B4 J2.B9 PFMF.050.1.1

## Tracks (layer width: path | path; a pad name or v marks a point on that pad's centre or on a via)
3V3
  Top 0.15: 93.25,62.25 R2_PINH1.2 | 93,52.5 R1_PINH1.2 | 89.25,60.5 U3.2 89.25,60.75 89.25,61 | 80.5,26.5 Q2.3 | R9.2 75.75,27.5 | 32.92,49.6 33,49.5 | 37.25,56.5 37.25,56.75 | 33.58,50.16 33.5,50.25
  Top 0.3: IC1.2 34.27,100.87 R_RESET.2 27.4,103.73 24.16,100.49 C9.1 R10.2 3.7,97.81 3.7,91.24 4.06,90.88 4.25,90.88 J4.P4 | R_BOOT.2 53,108.36 53,107 | 53,107 53,106 47.87,100.87 IC1.2 | R_CHANGE.2 67.18,107.93 65.25,106 54,106 53,107 | U1.3 36.08,57.92 37.25,56.75 37.88,56.13 41.51,56.13 41.67,56.3 41.67,57.28 U1.7 U1.8 43.59,97.1 46.98,100.5 47.18,100.5 IC1.2 | U2.2 9.31,48.31 9.31,47.98 12.44,44.86 R1.2 27.31,44.86 32.92,49.6 33.58,50.16 R6.2 | R5.2 49.25,38.1 | 49.25,38.1 52.53,38.1 | 52.53,38.1 R7.2 | 52.53,38.1 54.11,38.1 R8.2 64.97,27.4 R9.2 75.99,34.99 86,45 97,45 99,47 99,53 97,55 93,55 | R_CL1.2 83.9,25.23 83.17,25.96 81.02,25.96 Q2.3 | J3.2 154.91,18.63 TP16.TP 153.83,19.77 C1_BAT2.2 124.37,42.51 C3.+ | IC4.5 124.16,42.51 C3.+ | 93.25,62.25 92,62.25 91.25,63 | 93,55 93,55.75 89.25,59.5 89.25,60.5 | 93,55 93,52.5 | 80.5,26.5 79.5,27.5 79.5,27.75 79,28.25 76.5,28.25 75.75,27.5 | 49.25,38.1 49.25,36.25 48,35 47,35 46.75,35.25 46.75,35.75 33,49.5 | 37.25,56.5 33.5,52.75 33.5,50.25 | C3.+ 118.16,42.51 117,41.34 116.06,41.34 115.86,41.55 115.86,42.63 115.69,42.8 112.67,42.8 R2_PINH1.2 | 91.25,63 90.63,63.62 90.63,64.31 90.29,64.64 D7.2 | 91.25,63 90.26,62.01 90.18,62.01 89.25,61.08 89.25,61
32KHZ  (via drill 0.3)
  Top 0.15: R2_PINH1.1 93.25,61 v91.25,61 90.75,61 90.5,60.75 U3.1 | v30,62 17.75,49.75 17.75,49 U2.9
  Bottom 0.15: v30,62 60.25,62 62.5,59.75 90,59.75 v91.25,61
DN
  Top 0.15: 162.75,54 162.75,54.25 163,54.5 163.5,54.5 J2.A7 | 162.75,54 162.75,53.75 163,53.5 163.5,53.5 J2.B7 | 162.75,54 159.25,50.5 154.75,50.5 D1.4
DP
  Top 0.15: J2.A6 163.75,54 164.5,54 164.75,54.25 164.75,54.75 164.5,55 163.75,55 J2.B6 163.5,55 163,55 160,52 155.75,52 155.5,52.25 154.75,52.25 D1.6
EPD_3V3
  Top 0.15: J1.15 83.75,14.5 83.25,14.5 J1.16
  Top 0.3: L1.2 84,28.14 | 84,28.14 85.11,28.14 EPD_C5.2 91.48,23.71 TP17.TP | J1.16 83.24,14.41 83.24,14.85 78.56,19.53 78.56,25 | 78.56,25 Q2.2 77.84,26.09 77.84,26.52 77.12,27.25 C7.1 | 84,28.14 86,26.14 86,25 84.97,25 84.47,24.5 80.63,24.5 80.13,25 78.56,25
EPD_3V3_C  (via drill 0.3)
  Top 0.15: v80.5,25.5 80.25,25.5 80.24,25.49 | 5.42,47.58 v5.75,47.25
  Top 0.3: U2.18 19.66,65.81 19.66,65.48 12.19,58.02 11.46,58.02 6.5,53.06 6.5,48.43 6.29,48.22 6.29,48.21 6.16,48.09 6.04,47.97 5.81,47.97 5.42,47.58 3.58,45.74 TP13.TP | Q2.1 79.93,25.9 79.93,25.8 80.24,25.49 80.51,25.23 R_CL1.1
  Bottom 0.15: v80.5,25.5 80.25,25.75 58.75,25.75 47.75,36.75 26.5,36.75 15.25,48 9.5,48 8.75,47.25 v5.75,47.25
EPD_BUSY  (via drill 0.3, 0.35)
  Top 0.15: v86.75,15.25 86.75,14.5 J1.9 | v100.25,20 100.75,20.5 101.5,20.5 TP9.TP | v10.75,65 10.25,65.5 10.25,66.25 U2.26 | v93.5,28.5 93.5,29.45 92.41,30.54 92.41,31.59 v87,37 | v73,47 62.75,57.25 v62.75,60.25
  Bottom 0.15: v86.75,15.25 91.5,20 93.5,20 | v100.25,20 93.5,20 | v10.75,65 58,65 v62.75,60.25 | 93.5,20 v93.5,28.5 | v87,37 77,47 v73,47
EPD_CS  (via drill 0.3)
  Top 0.15: 84.75,13.25 84.5,13 83.64,13 83.19,12.55 79.45,12.55 75.5,16.5 75.5,23.75 D6.2 75.25,23.75 75,24 75.5,24.5 | 84.75,13.25 85.25,13.75 85.25,14.25 J1.12 | 75.5,24.5 75.75,24.75 75.75,26 R9.1 | v20.25,47.5 20.25,48.75 U2.11 | v72.75,25.25 v71.75,26.25 | 75.5,24.5 v75.25,24.75 | v97,12.5 101.5,17 TP10.TP | 84.75,13.25 84.68,13.25 v84.5,13.43
  Bottom 0.15: v20.25,47.5 30.5,37.25 51,37.25 62,26.25 v71.75,26.25 | v72.75,25.25 73.25,24.75 v75.25,24.75 | v84.5,13.43 85.79,13.43 85.81,13.45 86.19,13.45 86.45,13.19 86.45,13.14 87.1,12.5 v97,12.5
EPD_DC  (via drill 0.3)
  Top 0.15: v84.5,12.5 85.75,13.75 85.75,14.25 J1.11 | v13.25,47.5 12.75,48 12.75,48.75 U2.5 | v6.25,35.75 3.5,33 TP_11.TP
  Bottom 0.15: 16.75,46 15.25,47.5 v13.25,47.5 | v6.25,35.75 16.5,46 16.75,46 | v84.5,12.5 84.45,12.55 50.2,12.55 16.75,46
EPD_RST  (via drill 0.3)
  Top 0.15: v100.25,13 100.75,13.5 101.5,13.5 TP12.TP | v13.5,60.25 16.25,63 16.25,66.25 U2.21 | v31,48.75 27.75,52 v27.75,52.43 | J1.10 86.31,13.89 v86.88,13.32
  Bottom 0.15: v31,48.75 31.75,48 53,48 74.75,26.25 90,26.25 93.25,29.5 94.25,29.5 100.75,23 100.75,13 v100.25,13 87.2,13 v86.88,13.32 | v13.5,60.25 21.32,52.43 v27.75,52.43
FLASH_CS  (via drill 0.3)
  Top 0.15: R5.1 48.25,37 47.75,37 47,37.75 v47,41 48,42 D9.2 | 22.25,50.25 21.5,49.5 21.5,49 U2.12 | 22.25,50.25 32.5,60.5 35.75,60.5 U1.1 | 22.25,50.25 v22.5,50
  Bottom 0.15: v47,41 40.5,47.5 25,47.5 v22.5,50
GDR  (via drill 0.3)
  Top 0.15: v90.25,15.25 90.25,14.5 J1.2 | 69.5,13.75 v70.25,14.5 | 69.5,13.75 68,15.25 68,16 Q3.1 | 69.5,13.75 R4.2
  Bottom 0.15: v90.25,15.25 89.75,14.75 70.5,14.75 v70.25,14.5
GND  (via drill 0.3, 0.35)
  Top 0.15: U2.29_5 13.25,56.25 13.25,57.25 U2.29_6 | J2.A1 163.75,51 163.75,51.25 J2.B12 | 80,104 TP4.TP | CHANGE_BUTTON.2 66,108.25 66.25,108.5 67.88,108.5 | v48.5,100.75 47.75,100 IC1.3 | BOOT_BUTTON.1 47.22,108.03 v48.44,106.81
  Top 0.152: 163.75,51 164.25,50.5 J2.MP3 J2.MP1 J2.MP2 J2.MP4 | J2.B1 163.53,57.19 163.02,57.19 158.8,52.97 R2-USB.2 | U2.29_3 U2.29_2 7.5,51.62 U2.1 | U2.28 7.5,57.5 v8,57 | v9,54 11.12,54 U2.29_1 | J3.1 160,13.12 v160,13 | v159.6,10.9 159.18,10.9 SENSOR2.5 158.8,11.9 v157.9,12.8 | J4.P6 v6,92.6 | v9.3,98.7 8.81,99.19 C9.2 | J4.G4 2.08,96.08 v3,97 | v5,97 7,97 v8,96 | C7.2 77.12,22.92 v76.3,22.1 | v75,22 73.83,23.17 D6.1 | BOOT_BUTTON.2 50.72,107.72 v50,107 | C5.2 21.41,109.03 21.52,108.93 21.53,108.93 RESET_BUTTON.1 | BOOT_BUTTON.1 46.45,108.93 46.44,108.93 46.23,109.13 C6.2 | SENSOR2.7 156.83,11.63 156.83,11.84 156.6,12.07 v156.6,12.5 | CHANGE_BUTTON.1 61.52,108.93 61.51,108.93 61.35,109.09 C10.2 | J1.17 82.81,13.19 v83,13 | J1.8 87.17,14.19 87.17,13.64 87.31,13.5 87.31,13.14 87.06,12.89 86.7,12.89 86.6,13 v86,13
  Bottom 0.15: v48.5,100.75 48.5,106.75 v48.44,106.81
  Bottom 0.152: v8,57 8,55 v9,54 | v160,13 160,11.2 159.7,10.9 v159.6,10.9 | v6,92.6 8.2,94.8 | 8.2,94.8 9.3,95.9 v9.3,98.7 | v3,97 v5,97 | v8,96 8,95 8.2,94.8 | v76.3,22.1 76.2,22 v75,22 | v50,107 49.75,106.75 48.5,106.75 | v156.6,12.5 156.9,12.8 v157.9,12.8 | v83,13 v86,13
  other vias: 36,106 4,78 57,38 92,22 97,22 95,17 64,23 56,31 49,58 32,58 49,63 71,62 76,58 96,57 134,54 106,55 17,53 12,53 8,84 22,63 122,48 27,48
  pour Top: 75.96,10.06 75.98,10.08 94.02,10.08 94.04,10.06 94.06,10.04 94.08,10.02 94.08,0.08 168.92,0.08 168.92,66.92 91.98,66.92 91.96,66.94 91.94,66.96 91.92,66.98 91.92,110.92 68.08,110.92 68.08,109.98 68.06,109.96 68.04,109.94 68.02,109.92 19.98,109.92 19.96,109.94 19.94,109.96 19.92,109.98 19.92,110.92 0.08,110.92 0.08,0.08 75.92,0.08 75.92,10.02 75.94,10.04
  pour Bottom: 75.96,10.06 75.98,10.08 94.02,10.08 94.04,10.06 94.06,10.04 94.08,10.02 94.08,0.08 168.92,0.08 168.92,66.92 91.98,66.92 91.96,66.94 91.94,66.96 91.92,66.98 91.92,110.92 68.08,110.92 68.08,109.98 68.06,109.96 68.04,109.94 68.02,109.92 19.98,109.92 19.96,109.94 19.94,109.96 19.92,109.98 19.92,110.92 0.08,110.92 0.08,0.08 75.92,0.08 75.92,10.02 75.94,10.04
GPIO8
  Top 0.15: R1.1 19,46.25 19,48.75 U2.10
I2C_PW  (via drill 0.3)
  Top 0.15: SENSOR2.2 157.25,14 157.25,12.75 158,12 158,11.5 SENSOR2.6 158,11.25 158,10.5 156.5,9 | C1.1 159.25,6.25 158.25,6.25 C2.1 158,6.5 156.75,7.75 R1_PINH.2 156.5,7.5 156,7.5 | 156,7.5 155.5,7.5 R2_PINH.2 | 156.5,9 156.5,8 156,7.5 | 156.5,9 156.5,10.25 | 156.5,10.25 156.5,11.25 SENSOR2.8 | v21.5,67.5 21.5,66.5 U2.17 | v105.5,58.75 v115.5,48.75 | 156.5,10.25 v156.25,10.25
  Bottom 0.15: v21.5,67.5 23,66 98.25,66 v105.5,58.75 | v115.5,48.75 154,10.25 v156.25,10.25
INT_RTC  (via drill 0.3)
  Top 0.15: v91,55 91,52.75 92.5,51.25 93,51.25 R1_PINH1.1 | U3.3 88.25,60.5 87.5,59.75 v87.5,57.75 v84.5,54.75 | 16.25,47.75 16.25,48.75 U2.8 | v15.25,46.75 16.25,47.75 | v4.5,25.75 3.5,24.75 TP15.TP | 16.25,47.75 v16.5,47.5
  Bottom 0.15: v91,55 88.25,57.75 v87.5,57.75 | v15.25,46.75 5.75,37.25 5.75,25.75 v4.5,25.75 | v84.5,54.75 80.25,50.5 19.5,50.5 v16.5,47.5
IO/BOOT  (via drill 0.3)
  Top 0.15: 45,109 45,109.5 45.25,109.75 47,109.75 BOOT_BUTTON.4 47.25,109.75 49,108 50.5,109.5 BOOT_BUTTON.3 | 45,109 45,108.75 45.75,108 C6.1 | v24.25,72.75 24.25,66.5 U2.15 | 45,109 v37.5,101.5 | 52,107.83 R_BOOT.1
  Top 0.152: 49,108 49,107 50,106 51,106 52,107 52,107.83
  Bottom 0.15: v24.25,72.75 37.5,86 v37.5,101.5
IO/CHANGE  (via drill 0.3)
  Top 0.15: 61.5,107.25 61,107.75 C10.1 | 61.5,107.25 63.25,107.25 64,108 | 65.25,109.25 65.75,109.75 CHANGE_BUTTON.3 65.25,109.25 | 65.25,109.25 64,108 | 65.25,109.25 67.36,109.25 R_CHANGE.1 | 64,108 62.5,109.5 CHANGE_BUTTON.4 | v14,67.5 14,66.5 U2.23 | 61.5,107.25 v59.75,107.25
  Bottom 0.15: v14,67.5 18.75,72.25 24.75,72.25 v59.75,107.25
MISO  (via drill 0.3)
  Top 0.15: J4.P7 5,93.5 6,93.5 6.75,92.75 6.75,76.5 3.25,73 TP6.TP 3,72.75 8.75,67 8.75,66.5 U2.27 9,66.25 9,65.5 v10.75,63.75 | v53.5,37.5 54,37 R8.1 | v53.5,41.25 53.75,41.5 54.25,41.5 D12.2 54.25,41.75 54.25,42.25 v45.5,51 | v36.75,59.25 36,59.25 U1.2
  Bottom 0.15: v53.5,41.25 v53.5,37.5 | v45.5,51 45,51 v36.75,59.25 15.25,59.25 v10.75,63.75
MOSI  (via drill 0.3)
  Top 0.15: v84.25,15.75 84.25,14.5 J1.14 | v63.75,25.25 v53,36 52.25,36.75 52.5,37 R7.1 | 43.75,51.25 43.75,56.5 U1.5 | 52.5,42.5 52.75,42.25 52.75,41.75 D11.2 | 52.5,42.5 43.75,51.25 | 43.75,51.25 v43.5,51 | U2.7 15.25,49 v15.25,50 v14.25,51 | v6.25,89.25 5,89.25 J4.P3 | v2.25,28.5 3.25,27.5 TP7.TP | 52.5,42.5 v52.75,42.75
  Bottom 0.15: v84.25,15.75 73.25,15.75 v63.75,25.25 | v15.25,50 17.25,52 42.5,52 v43.5,51 | v6.25,89.25 6.25,67 9.25,64 9.25,62.25 14.25,57.25 v14.25,51 11.5,51 8.54,48.04 4.4,48.04 3.5,47.14 3.5,29.75 v2.25,28.5 | v53,36 53,42.75 v52.75,42.75
N$1  (via drill 0.3)
  Top 0.15: v148.75,52.5 148,52.5 R2-USB1.2 | v162,52.5 162.5,52.5 163,53 163.5,53 J2.A5
  Bottom 0.15: v162,52.5 v148.75,52.5
N$2
  Top 0.15: R2-USB.1 156.5,54.25 159,54.25 163,58.25 163.26,57.99 165.01,57.99 165.5,57.5 165.5,56.75 164.75,56 163.75,56 J2.B5
N$3  (via drill 0.3)
  Top 0.15: 117.5,42.75 118.25,43.5 118.25,44 118,44.25 IC4.3 | 117.5,42.75 117,42.25 116.75,42.25 C1_BAT1.2 | 116.5,43.75 115.75,43.75 D2.1 | 117.5,42.75 116.5,43.75 | 116.5,43.75 116.5,45 117.25,45.75 117.75,45.75 IC4.1 118,46 118.5,46 v118.75,46.25 | v128.75,48.75 130,50 130,50.5 Q1.2
  Bottom 0.15: v128.75,48.75 126.25,46.25 v118.75,46.25
N$4
  Top 0.15: CHG_LED.C 113,55.5 113,56 113.25,56.25 115.25,56.25 116.25,55.25 116.5,55.5 R1_BAT.1
N$5  (via drill 0.3)
  Top 0.15: v118.5,55.25 118.25,55.5 117.75,55.5 R1_BAT.2 | v121.25,54.25 121.75,53.75 122.25,53.75 MCP73831.1
  Bottom 0.15: v118.5,55.25 119.5,54.25 v121.25,54.25
N$8
  Top 0.15: C4.1 98.5,31 95.25,27.75 93.25,27.75 D4.1 93,27.75 92.5,27.75 86.5,33.75 84.75,33.75 83.5,35 81.75,35 D3.2
N$9
  Top 0.15: R2_BAT.2 119.75,53.75 MCP73831.5
N$10  (via drill 0.3)
  Top 0.15: v79.25,18 79.25,14.5 J1.24 | v79.25,20 80,20.75 80,21.25 EPD_C12.2
  Bottom 0.15: v79.25,20 v79.25,18
N$11
  Top 0.15: IC1.5 50.5,101.75 51.75,101.75 C_DELAY.1
N$12  (via drill 0.3)
  Top 0.15: v80.25,17 80.25,14.5 J1.22 | v83.25,20 83.25,20.75 82.75,21.25 EPD_C10.2
  Bottom 0.15: v83.25,20 v80.25,17
N$13
  Top 0.15: 25,109.5 24.5,109 24.5,108.25 23.25,107 21.25,107 20.75,107.5 C5.1 | 25,109.5 25.75,109.5 RESET_BUTTON.3 26,109.5 26.25,109.25 27.25,109.25 R_RESET.1 | 25,109.5 22.5,109.5 RESET_BUTTON.4
N$14  (via drill 0.3)
  Top 0.15: v81,16.25 81.25,16 81.25,14.5 J1.20 | v86.5,20.5 85.75,21.25 EPD_C8.2
  Bottom 0.15: v81,16.25 81.25,16.5 82.5,16.5 v86.5,20.5
N$15  (via drill 0.3)
  Top 0.15: v81.5,13.5 81.75,13.75 81.75,14.25 J1.19 | v90.5,18 87.25,21.25 EPD_C7.2
  Bottom 0.15: v81.5,13.5 82.25,14.25 90,14.25 90.75,15 90.75,18 v90.5,18
N$16  (via drill 0.3)
  Top 0.15: v82.25,13.5 82.25,14.25 J1.18 | v91.25,18.75 88.75,21.25 EPD_C6.2
  Bottom 0.15: v91.25,18.75 91.5,18.75 91.5,15 90.36,13.86 82.61,13.86 v82.25,13.5
N$18
  Top 0.15: R_CAPACITOR.1 88.25,63.76 88.25,65.25 D7.1
N$24  (via drill 0.3)
  Top 0.15: v84.5,19.25 88.75,15 88.75,14.5 J1.5 | v72,20.25 71.25,19.5 EPD_C2.2
  Bottom 0.15: v84.5,19.25 82.25,17 81,17 80.5,16.5 75.75,16.5 v72,20.25
N$25
  Top 0.15: J1.4 89.25,14.25 89.25,13.75 87.5,12 79.5,12 73.75,17.75 73.75,19 73.25,19.5 72.75,19.5 EPD_C1.2
PREVGH  (via drill 0.3)
  Top 0.15: v78.5,18 78.5,14 79,13.5 80.5,13.5 80.75,13.75 80.75,14.25 J1.21 | v83.75,20.5 84.5,21.25 EPD_C9.2 | v94,29 96,31 96.5,31 D5.1
  Bottom 0.15: v78.5,18 78.5,20.5 80.5,20.5 81,21 83.25,21 | v83.75,20.5 83.25,21 | v94,29 93.25,29 93,28.75 93,21 83.25,21
PREVGL  (via drill 0.3)
  Top 0.15: v79.75,17.5 79.75,14.5 J1.23 | v80.25,20 81.5,21.25 EPD_C11.2 | v92.5,24.5 95.5,27.5 96.5,27.5 D4.2
  Bottom 0.15: v80.25,20 79.75,20 v79.75,17.5 78,17.5 78,20.5 79,21.5 89.5,21.5 v92.5,24.5
RESE
  Top 0.15: 73.5,15 72.5,16 R3.2 | 73.5,15 77.75,10.75 86.75,10.75 89.75,13.75 89.75,14.25 J1.3 | 73.5,15 70.5,15 69.5,16 69.25,16 Q3.2
RESE'
  Top 0.15: SJ1.2 67.75,12 68,12.25 68,13.75 R2.2 67.75,14 67.75,14.5 67.25,15 67.25,16.75 67.5,17 69.5,17 70.5,16 71,16 R3.1
RESET  (via drill 0.3)
  Top 0.15: v17,55.75 12.5,51.25 10.25,51.25 10,51 10,49 U2.3 | IC1.1 47.48,101.75 v38.5,101.75
  Bottom 0.15: v38.5,101.75 38.25,102 37.25,102 10.25,75 10.25,62.25 10.5,62.25 v17,55.75
RTC_RST  (via drill 0.3)
  Top 0.15: v24,64.5 22.75,65.75 22.75,66.25 U2.16 | v86.5,59.25 86.75,59.5 86.75,60.5 U3.4
  Bottom 0.15: v24,64.5 27,61.5 60.25,61.5 62.5,59.25 v86.5,59.25
RX
  Top 0.15: U2.24 13.2,66.97 13.2,70.66 TP2.TP
SCK  (via drill 0.3, 0.35)
  Top 0.15: v84.75,15.25 84.75,14.5 J1.13 | v47.5,36.25 47.5,36.75 35.25,49 v35.25,51.5 35.75,52 | 35.75,52 36.25,52 D10.2 36.25,52.25 36.5,52.5 38.75,52.5 42.25,56 42.25,56.5 43.5,57.75 U1.6 | 35.75,52 34.5,52 R6.1 | U2.6 14,49 v14,50 | v6.25,91.5 5,91.5 J4.P5 | v4.5,31.25 3.5,30.25 TP8.TP
  Bottom 0.15: v84.75,15.25 68.5,15.25 v47.5,36.25 | v35.25,51.5 17.14,51.5 15.68,50.04 15.68,49.82 15.43,49.57 15.07,49.57 14.82,49.82 14.64,50 v14,50 | v6.25,91.5 9.75,88 9.75,62.25 15.29,56.71 15.29,51.29 v14,50 | v4.5,31.25 4.5,47.75 8.75,47.75 11,50 v14,50
SCL  (via drill 0.3)
  Top 0.15: R2_PINH.1 155.25,6.5 154.5,7.25 154.5,13.75 156,15.25 v158.25,15.25 158.5,15.25 158.75,15 158.75,14.25 SENSOR2.4 | v142.75,48.75 v135.25,56.25 134.75,56.75 134.25,56.75 U4.7 | v163.25,21.25 163.75,20.75 164.5,20.75 J3.4 | v17.75,64.5 17.75,66.25 U2.20 | v90.5,53 90.5,51.5 U3.16
  Bottom 0.15: v142.75,48.75 163.25,28.25 v163.25,21.25 163.25,20.25 v158.25,15.25 | v17.75,64.5 21.25,61 60.25,61 65.75,55.5 81.75,55.5 | 81.75,55.5 84.5,55.5 87.5,52.5 90,52.5 v90.5,53 | v135.25,56.25 135.25,58.25 84.5,58.25 81.75,55.5
SDA  (via drill 0.3)
  Top 0.15: 160,11.5 158,13.5 158,14 SENSOR2.3 | 160,11.5 160.5,11 160.5,6 160,5.5 157.25,5.5 156.75,6 156.75,6.25 R1_PINH.1 | 160,11.5 165.75,17.25 v165.75,19.25 165.5,19.5 164.75,19.5 J3.3 | v133.5,57.75 134,57.25 U4.8 | v89.75,53 89.25,52.5 89.25,51.5 U3.15 | v19,67.5 19,66.5 U2.19 | v83.75,56.75 v80.25,60.25
  Bottom 0.15: 133.25,57.5 131.5,55.75 92.5,55.75 v89.75,53 87.5,53 v83.75,56.75 | 133.25,57.5 v133.5,57.75 | v19,67.5 21,65.5 75,65.5 v80.25,60.25 | v165.75,19.25 163.75,21.25 163.75,50.5 149.75,50.5 144.5,55.75 135,55.75 133.25,57.5
SRC  (via drill 0.3)
  Top 0.15: C4.2 94.5,32.5 v94,32 93.25,31.25 D5.2 | v75,26.75 68.5,20.25 68.5,18.25 Q3.3 | v83.5,31.25 83.5,32.75 L1.1
  Bottom 0.15: v75,26.75 79.5,31.25 v83.5,31.25 93.25,31.25 v94,32
SS_SD  (via drill 0.3)
  Top 0.15: R10.1 6.5,99 7,99 v7.75,98.25 9.11,98.25 10.47,98.25 D8.2 | v10.5,50.75 11.25,50 11.25,49 U2.4 | v6.5,66 6.5,67.25 1.5,72.25 1.5,80.25 6,84.75 | 6,84.75 6.25,85 6.25,87.5 5.5,88.25 J4.P2 | 6,84.75 v5.75,85
  Bottom 0.15: v10.5,50.75 10.5,60.5 6.5,64.5 v6.5,66 | v5.75,85 5.75,92.21 5.55,92.41 5.55,96.05 v7.75,98.25
TX
  Top 0.15: U2.25 11.25,66.5 11.25,72.25 11.23,72.27 TP1.TP
USB_D+  (via drill 0.3)
  Top 0.15: v149,50.5 150.75,52.25 152,52.25 D1.1 | v25,49.75 24.25,49 U2.14
  Bottom 0.15: v25,49.75 88,49.75 91.8,53.55 145.95,53.55 v149,50.5
USB_D-  (via drill 0.3)
  Top 0.15: v150.25,49.25 151.5,50.5 152,50.5 D1.3 | v97.5,49.25 v96.5,49.25 | v23.25,50 22.75,49.5 22.75,49 U2.13
  Bottom 0.15: v97.5,49.25 v150.25,49.25 | v96.5,49.25 24,49.25 v23.25,50
VBAT
  Top 0.15: 132,56.25 U4.3 | 132,56.75 U4.2
  Top 0.3: U4.3 132.03,56.08 131.64,56.08 129.26,53.7 Q1.3 | U4.2 132.03,56.76 131.64,56.76 130.99,57.41 C2_BAT.1 | TP3.TP 129.25,59.31 C2_BAT.1 | 132,56.75 132,56.25 | MCP73831.3 124.06,57.41 C2_BAT.1
VBUS
  Top 0.15: PFMF.050.1.2 149.25,44.25 138,44.25 130.75,51.5 129.75,51.5 128.5,50.25 128.25,50.5 Q1.1
  Top 0.3: PFMF.050.1.2 152.58,47.47 C4_USB.1 C5_USB.1 153.85,49.3 153.85,50.94 154.01,51.1 154.36,51.1 D1.5 | TP14.TP 119.81,57.29 MCP73831.4 | CHG_LED.A 114.69,55.44 C1_BAT.1 | C1_BAT.1 116.29,53.95 117.02,54.68 118.73,54.68 MCP73831.4 | C1_BAT.1 116.18,46.6 D2.2 114.19,45.94 R1_PWRUSB.2 | MCP73831.4 120.75,54.82 120.75,54.04 124.29,50.5 128.25,50.5
VRTC
  Top 0.3: C10_SUPERCAP.2 94.35,51.01 93.72,50.38 91.39,50.38 C8.1 89.47,49.53 88.7,50.3 88.7,50.7 U3.14 88,59.04 88.7,59.73 88.7,61.8 90,63.1 R_CAPACITOR.2
VUSB  (via drill 0.3)
  Top 0.15: J2.A4 163.5,51.75 163.44,51.81 | v162.75,56.25 163,56.5 163.5,56.5 J2.B4 163.75,56.5 163.75,56.75 J2.A9 | 162.41,51.09 v162.5,51
  Top 0.3: J2.B9 163.44,51.81 163.31,51.67 162.99,51.67 162.41,51.09 155.52,44.2 PFMF.050.1.1
  Bottom 0.15: v162.5,51 162.5,56.25 v162.75,56.25
(copper drawn outside any net)
  shapes: Bottom area x1

## Text on the board
tNames: GND | GND | MISO | TX | RX | VBUS | VBAT | 3V3_C | EPD_DC | SCK | MOSI | INT_RTC | EPD_3V3 | 3V3 | EPD_BUSY | EPD_CS | EPD_RST